# EAGLE board THE OMEGA (3) (EAGLE 9.7.0)

Size 178.9 x 103.41 mm. Coordinates in mm from the lower left corner, seen from the top.
Outline: 0,0 178.9,0 178.9,103.41 0,103.41 0,0
Copper layers (1*16): Top 0.035mm / dielectric 1.5mm / Bottom 0.035mm
Design rules "default": minimum track width 6mil, minimum drill 0.35mm, track to track 6mil, track to pad 6mil, pad to pad 6mil, via to via 6mil, smd to smd 6mil, copper to edge 40mil, drill to drill 6mil, minimum pad ring 10mil, minimum via ring 8mil, stop-mask expansion 4mil, vias tented up to drill 0mil, thermal gap 10mil

## Footprints (pad centres in the part's own frame; a part is rotated, then mirrored left to right if it is on the bottom)
LEDRD254W60D565H860B_G = drill 0.981 pad 1.581: 1 -1.27,0; 2 1.27,0
LEDRD254W60D565H860B = drill 0.981 pad 1.581: 1 -1.27,0; 2 1.27,0
LEDRD254W60D565H860B_Y = drill 0.981 pad 1.581: 1 -1.27,0; 2 1.27,0
PIEZO = drill 1 pad 1.6: 1 -3.5,0; 2 3.5,0
RESAD1016W63L850D250B = drill 0.83 pad 1.43: 1 -5.08,0; 2 5.08,0
GL5528 = drill 0.8 pad 1.4: 1 -1.702,0; 2 1.702,0
SWITCH-MOMENTARY-PTH-6.5MM = drill 1.016 pad 1.88: 1 -3.251,2.261; 2 3.251,2.261; 3 -3.251,-2.261; 4 3.251,-2.261
SG90 = drill 1.016 long: 1 -2.54,0; 2 0,0; 3 2.54,0
ARDUINO-UNO-R3-SHIELD = drill 1.016 pad 1.88: 3.3V 24.13,-2.54; 5V 24.13,0; A0 24.13,12.7; A1 24.13,15.24; A2 24.13,17.78; A3 24.13,20.32; A4 24.13,22.86; A5 24.13,25.4; AREF -24.13,-13.97; D2 -24.13,20.32; D3 -24.13,17.78; D4 -24.13,15.24; D5 -24.13,12.7; D6 -24.13,10.16; D7 -24.13,7.62; D8 -24.13,3.81; D9 -24.13,1.27; D10 -24.13,-1.27; D11 -24.13,-3.81; D12 -24.13,-6.35; D13 -24.13,-8.89; GND@0 24.13,2.54; GND@1 24.13,5.08; GND@2 -24.13,-11.43; IOREF 24.13,-7.62; NC 24.13,-10.16; RES 24.13,-5.08; RX -24.13,25.4; SCL -24.13,-19.05; SDA -24.13,-16.51; TX -24.13,22.86; VIN 24.13,7.62

## Placement (x,y rotation side)
D7  GREEN  [LEDRD254W60D565H860B_G]  167.44,73.62 180 top
D9  RED  [LEDRD254W60D565H860B]  158.9,73.79 180 top
D11  YELLOW  [LEDRD254W60D565H860B_Y]  150.74,73.75 180 top
PIEZO13  PIEZO  [PIEZO]  157.47,89.83 0 top
R11  100  [RESAD1016W63L850D250B]  160.17,68.71 90 top
R12  100  [RESAD1016W63L850D250B]  152.01,68.67 90 top
R13  100  [RESAD1016W63L850D250B]  168.71,68.54 90 top
R14  PHOTOCELL_GL5528  [GL5528]  5.71,79.19 0 top
R15  32k  [RESAD1016W63L850D250B]  12.06,74.11 0 top
S6  SWITCH_MOMENTARY  [SWITCH-MOMENTARY-PTH-6.5MM]  58.15,89.57 90 top
S8  SWITCH_MOMENTARY  [SWITCH-MOMENTARY-PTH-6.5MM]  58.58,75.11 90 top
SERVO5  SERVOSG90  [SG90]  153.56,45.76 0 top
SERVO6  SERVOSG90  [SG90]  171.91,45.64 0 top
U3  ARDUINO-UNO-R3-SHIELD  [ARDUINO-UNO-R3-SHIELD]  110.09,29.84 270 top

## Library data of the parts
D7 = Tinkercad; CATEGORY: Opto-Electronic; SUB-CATEGORY: LED; VALUE: LED_GREEN
D9 = Tinkercad; CATEGORY: Opto-Electronic; SUB-CATEGORY: LED; VALUE: LED_RED
D11 = Tinkercad; CATEGORY: Opto-Electronic; SUB-CATEGORY: LED; VALUE: LED_YELLOW
PIEZO13 R11-R15 S6 S8 SERVO5 SERVO6 U3 = Tinkercad

## Nets
D7_A: D7.1 R13.2
D9_A: D9.1 R11.2
D11_A: D11.1 R12.2
U3_5V: R14.1 SERVO5.2 SERVO6.2 U3.5V
U3_D3: SERVO6.3 U3.D3
U3_D5: SERVO5.3 U3.D5
U3_D6: S6.2 U3.D6
U3_D7: R13.1 U3.D7
U3_D8: S8.2 U3.D8
U3_D9: R11.1 U3.D9
U3_D10: R14.2 R15.1 U3.D10
U3_D11: R12.1 U3.D11
U3_D13: PIEZO13.1 U3.D13
U3_GND: D7.2 D9.2 D11.2 PIEZO13.2 R15.2 S6.3 S8.3 SERVO5.1 SERVO6.1 U3.GND@0 U3.GND@1 U3.GND@2

## Tracks (layer width: path | path; a pad name or v marks a point on that pad's centre or on a via)
D7_A  (1 unrouted)
D9_A  (1 unrouted)
D11_A  (1 unrouted)
U3_5V  (3 unrouted)
U3_D3  (1 unrouted)
U3_D5  (1 unrouted)
U3_D6  (1 unrouted)
U3_D7  (1 unrouted)
U3_D8  (1 unrouted)
U3_D9  (1 unrouted)
U3_D10  (2 unrouted)
U3_D11  (1 unrouted)
U3_D13  (1 unrouted)
U3_GND  (11 unrouted)